# EAGLE board sample_and_hold (EAGLE 8.2.2)
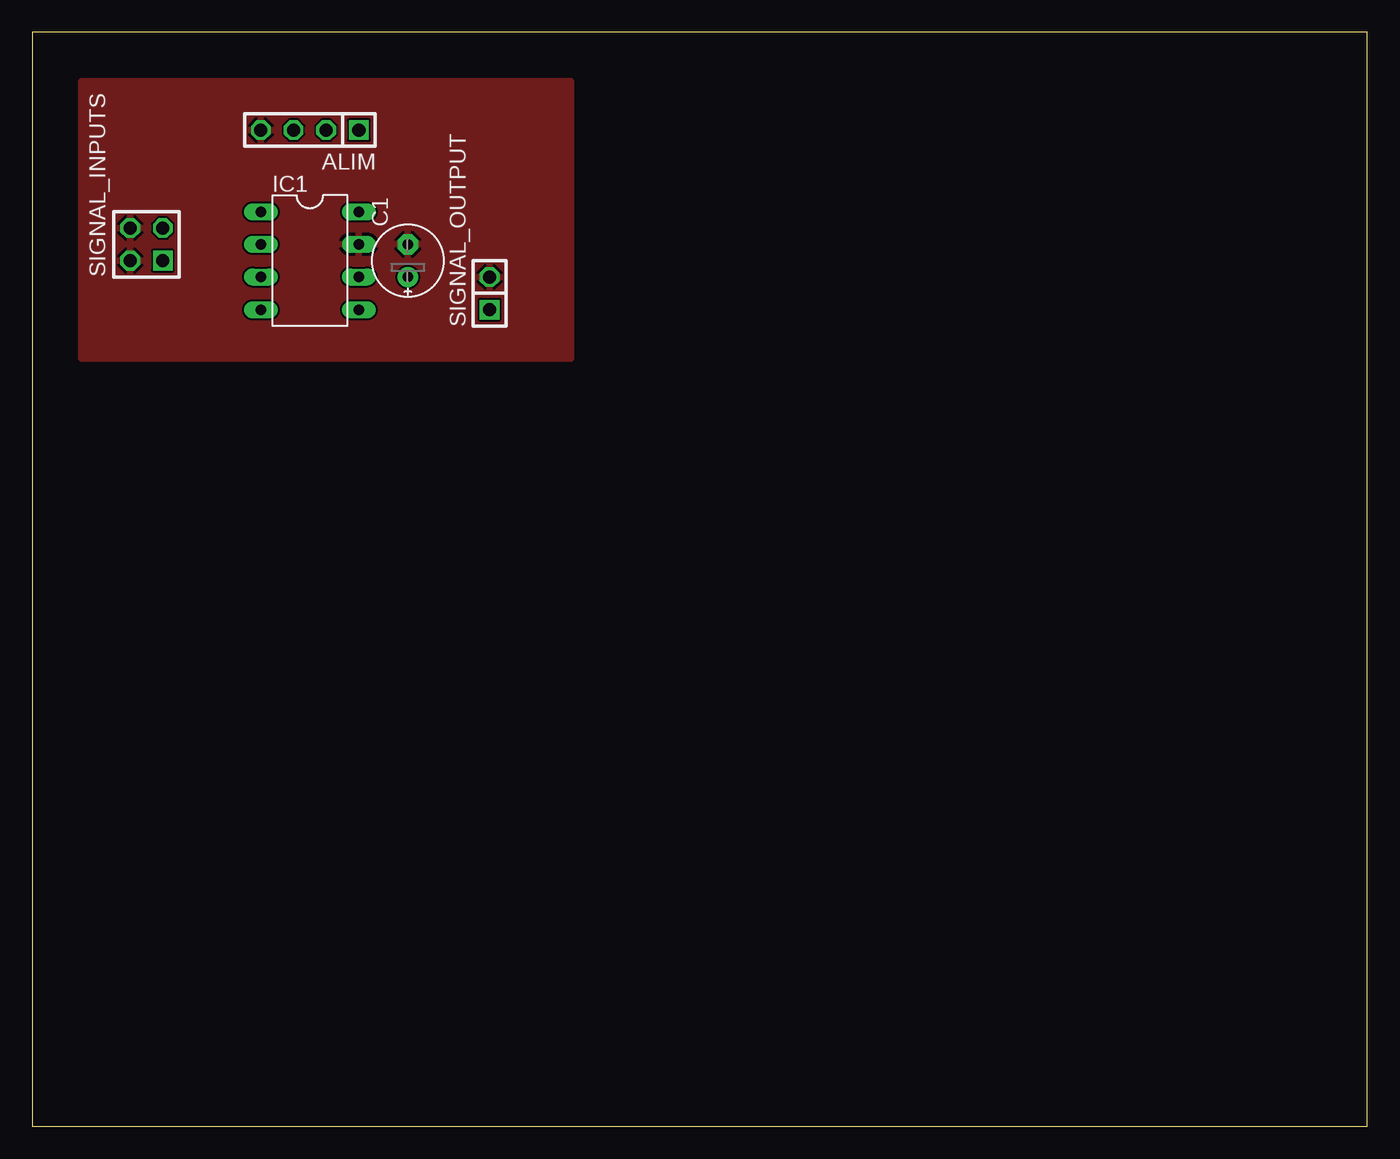
[diagram p0: board, top side]
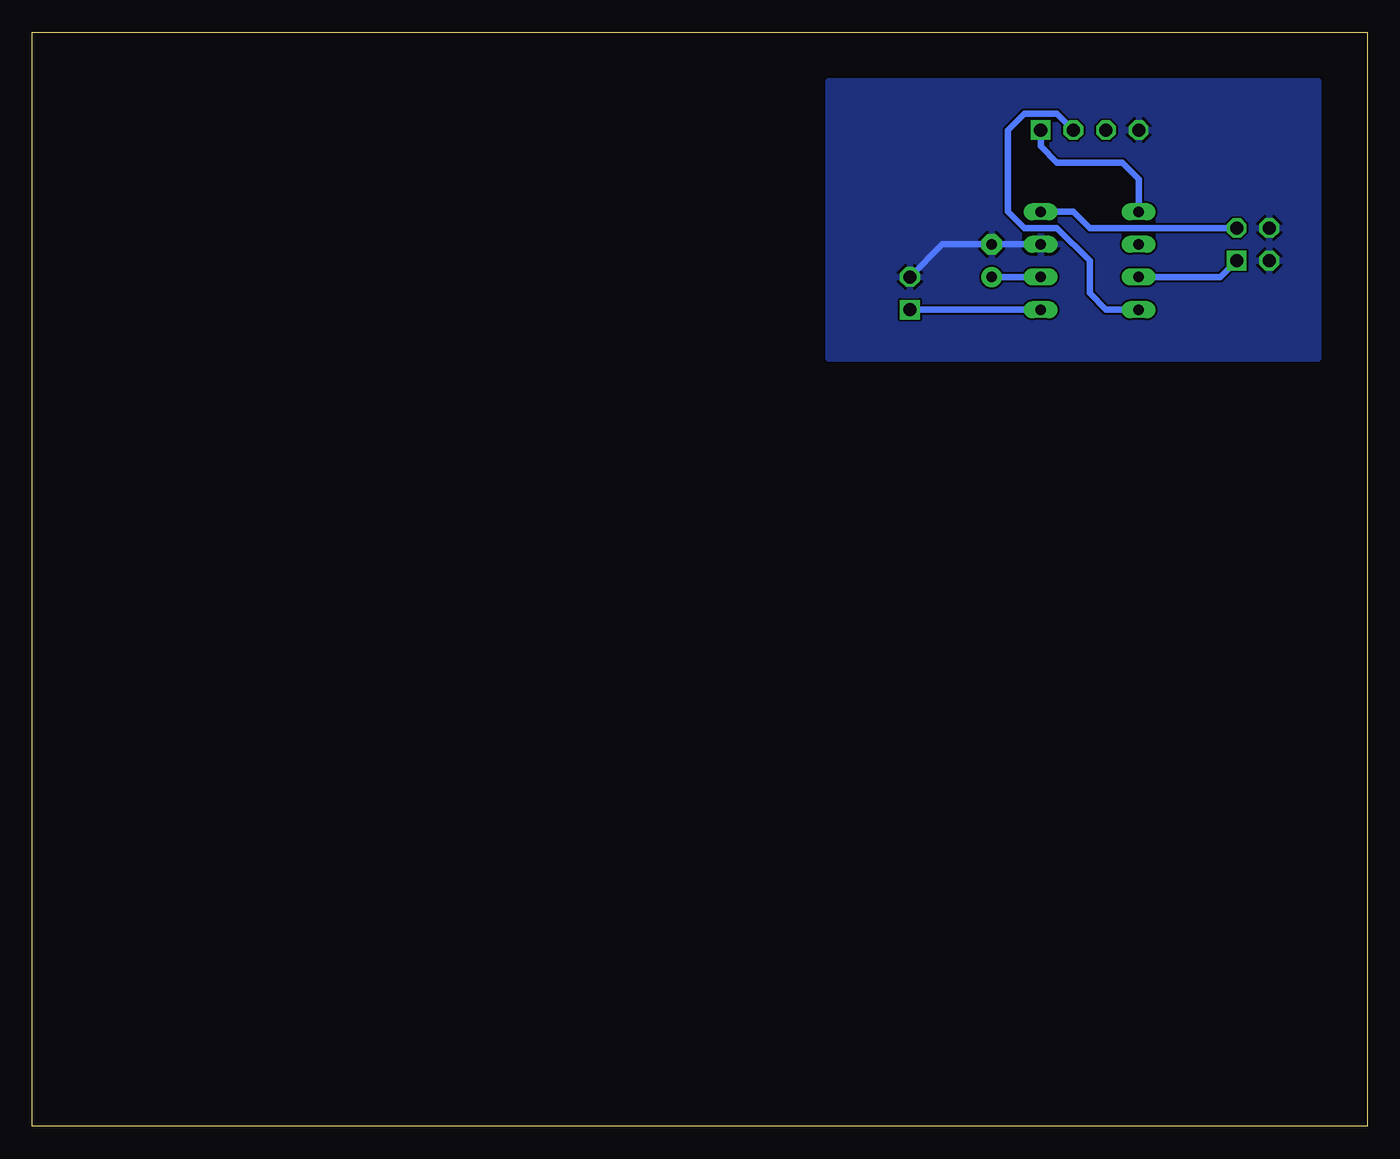
[diagram p1: board, bottom side, seen from below]

Size 103.81 x 85.08 mm. Coordinates in mm from the lower left corner, seen from the top.
Outline: 0,0 103.81,0 103.81,85.08 0,85.08 0,0
Copper layers (1*16): Top 0.035mm / dielectric 1.5mm / Bottom 0.035mm
Design rules "default": minimum track width 6mil, minimum drill 0.35mm, track to track 6mil, track to pad 6mil, pad to pad 6mil, via to via 6mil, smd to smd 6mil, copper to edge 40mil, drill to drill 6mil, minimum pad ring 10mil, minimum via ring 8mil, stop-mask expansion 4mil, vias tented up to drill 0mil, thermal gap 10mil

## Footprints (pad centres in the part's own frame; a part is rotated, then mirrored left to right if it is on the bottom)
1X04 = drill 1.016 square: 1 -3.81,0 | drill 1.016 octagon: 2 -1.27,0; 3 1.27,0; 4 3.81,0
E2,5-6E = drill 0.813 pad 1.575: + -1.27,0 | drill 0.813 pad 1.575 octagon: - 1.27,0
DIL08 = drill 0.813 long: 1 -3.81,-3.81; 2 -1.27,-3.81; 3 1.27,-3.81; 4 3.81,-3.81; 5 3.81,3.81; 6 1.27,3.81; 7 -1.27,3.81; 8 -3.81,3.81
2X02 = drill 1.016 square: 1 -1.27,-1.27 | drill 1.016 octagon: 2 -1.27,1.27; 3 1.27,-1.27; 4 1.27,1.27
1X02 = drill 1.016 square: 1 -1.27,0 | drill 1.016 octagon: 2 1.27,0

## Placement (x,y rotation side)
ALIM  [1X04]  21.59,77.47 180 top
C1  [E2,5-6E]  29.21,67.31 90 top
IC1  TL081P  [DIL08]  21.59,67.31 270 top
SIGNAL_INPUTS  [2X02]  8.89,68.58 90 top
SIGNAL_OUTPUT  [1X02]  35.56,64.77 90 top

## Library data of the parts
ALIM SIGNAL_INPUTS SIGNAL_OUTPUT = pinhead
C1 = resistor
IC1 = linear4

## Nets
5V: ALIM.3
+15V: ALIM.1 IC1.1
-15V: ALIM.2 IC1.4
AGND: ALIM.4 C1.- IC1.7 SIGNAL_INPUTS.2 SIGNAL_INPUTS.4 SIGNAL_OUTPUT.2
IN: IC1.3 SIGNAL_INPUTS.1
LOGIC_INPUT: IC1.8 SIGNAL_INPUTS.3
N$2: C1.+ IC1.6
NC: IC1.2
OUT: IC1.5 SIGNAL_OUTPUT.1

## Tracks (layer width: path | path; a pad name or v marks a point on that pad's centre or on a via)
+15V
  Bottom 0.508: ALIM.1 25.4,76.2 24.13,74.93 19.05,74.93 17.78,73.66 IC1.1
-15V
  Bottom 0.508: ALIM.2 24.13,78.74 26.67,78.74 27.94,77.47 27.94,71.12 26.67,69.85 24.13,69.85 21.59,67.31 21.59,64.77 20.32,63.5 IC1.4
AGND
  Bottom 0.508: IC1.7 C1.- 33.02,68.58 SIGNAL_OUTPUT.2
  pour Top: 3.81,81.28 41.91,81.28 41.91,59.69 3.81,59.69
  pour Bottom: 3.81,81.28 41.91,81.28 41.91,59.69 3.81,59.69
IN
  Bottom 0.508: SIGNAL_INPUTS.1 11.43,66.04 IC1.3
LOGIC_INPUT
  Bottom 0.508: 14.29,69.85 13.97,69.85 | 14.29,69.85 21.59,69.85 22.86,71.12 IC1.8 | SIGNAL_INPUTS.3 14.29,69.85
N$2
  Bottom 0.508: IC1.6 C1.+
OUT
  Bottom 0.508: IC1.5 SIGNAL_OUTPUT.1